# EAGLE board uhf.real.control.olimex (EAGLE 6.5.0)
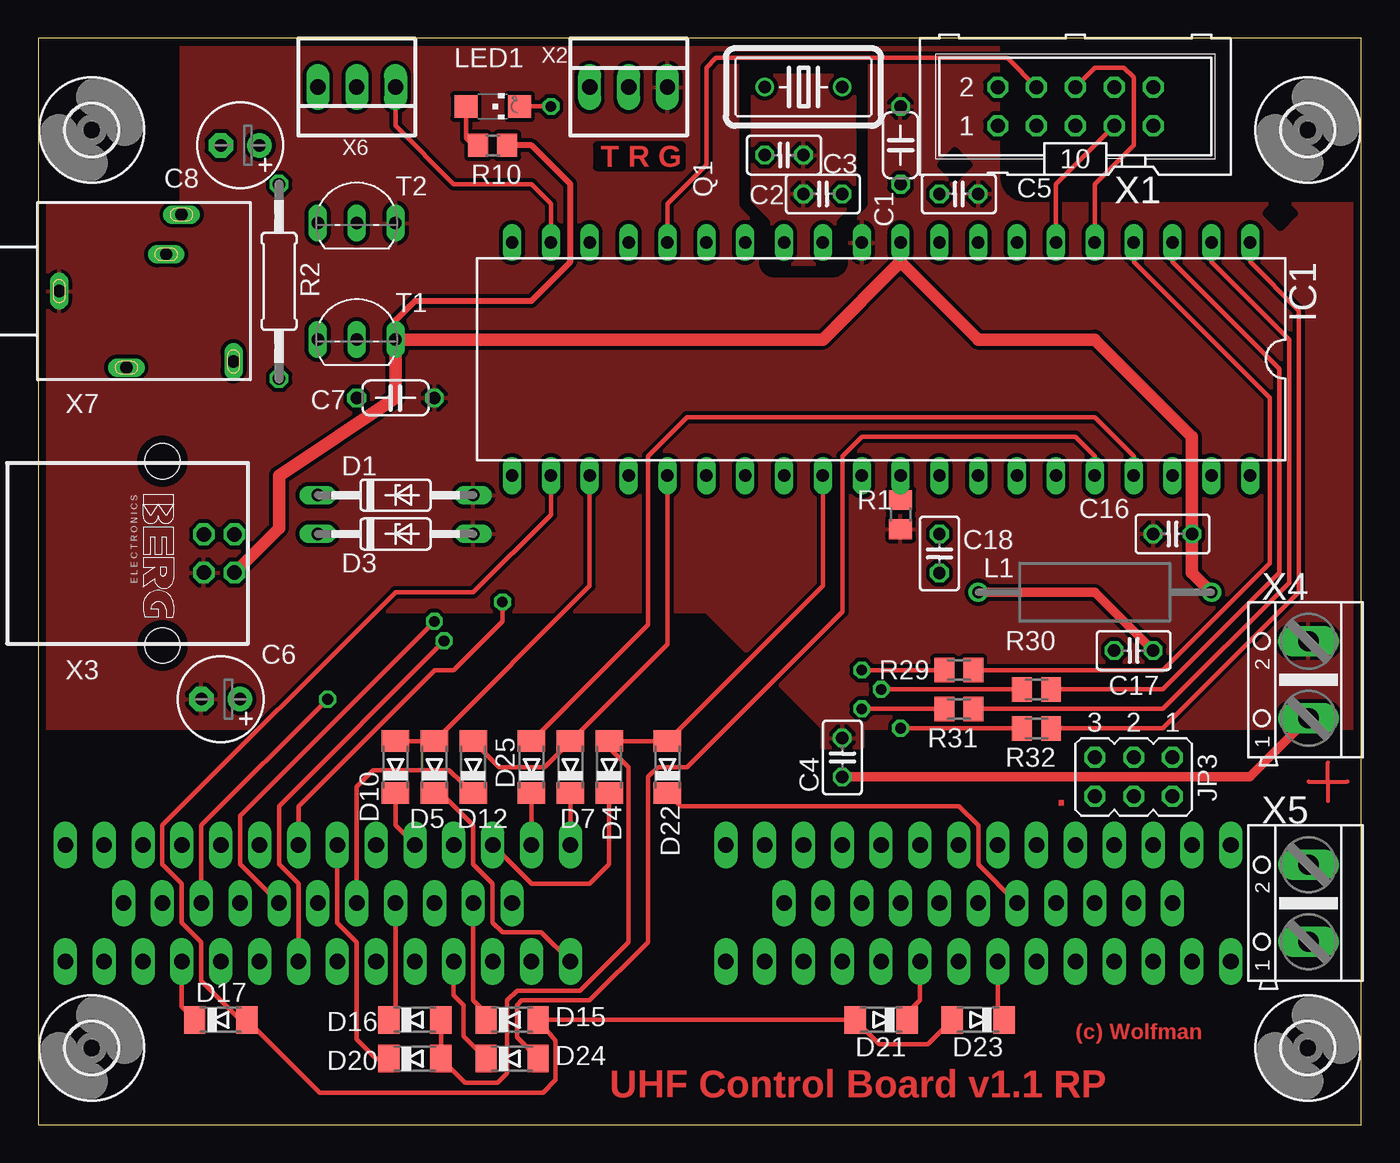
[diagram p0: board, top side]
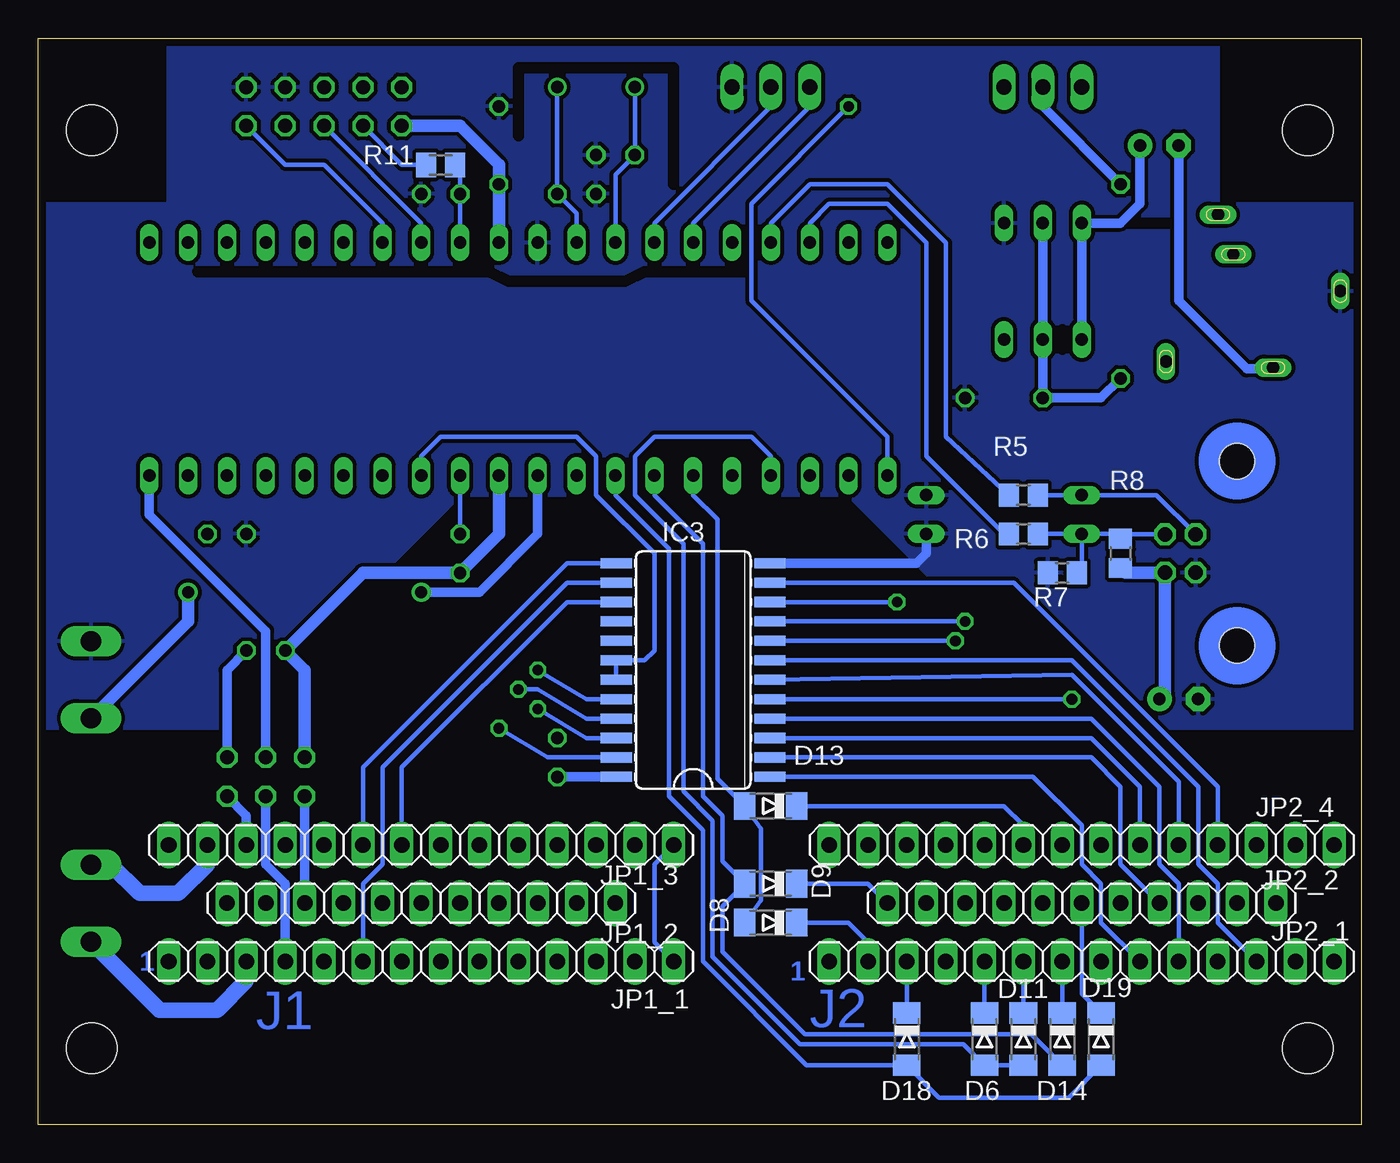
[diagram p1: board, bottom side, seen from below]

Size 86.5 x 71 mm. Coordinates in mm from the lower left corner, seen from the top.
Outline: 0,0 86.5,0 86.5,71 0,71 0,0
Copper layers (1*16): Top 0.035mm / dielectric 1.5mm / Bottom 0.035mm
Design rules "8mils *": minimum track width 8mil, minimum drill 0.7mm, track to track 8mil, track to pad 8mil, pad to pad 8mil, via to via 8mil, smd to smd 0mil, copper to edge 20mil, drill to drill 10mil, minimum pad ring 8mil, minimum via ring 8mil, stop-mask expansion 0mil, vias tented up to drill 0mil, thermal gap 10mil
tRestrict: area 59,61.8 to 60.8,63.6; area 80.3,58.7 to 82.1,60.5; 10 lines
bRestrict: 10 lines

## Footprints (pad centres in the part's own frame; a part is rotated, then mirrored left to right if it is on the bottom)
C050-024X044 = drill 0.813 octagon: 1 -2.54,0; 2 2.54,0
C025-025X050 = drill 0.813 octagon: 1 -1.27,0; 2 1.27,0
E2,5-6 = drill 0.813 pad 1.6: + -1.27,0 | drill 0.813 pad 1.6 octagon: - 1.27,0
DO35Z10 = drill 0.813 long: A 5.08,0; C -5.08,0
MINIMELF = smd 1.4 x 1.8: A 1.7,0; C -1.7,0
3,3 = hole 3.3: 0,0
DIL40 = drill 0.813 long: 1 -24.13,-7.62; 2 -21.59,-7.62; 3 -19.05,-7.62; 4 -16.51,-7.62; 5 -13.97,-7.62; 6 -11.43,-7.62; 7 -8.89,-7.62; 8 -6.35,-7.62; 9 -3.81,-7.62; 10 -1.27,-7.62; 11 1.27,-7.62; 12 3.81,-7.62; 13 6.35,-7.62; 14 8.89,-7.62; 15 11.43,-7.62; 16 13.97,-7.62; 17 16.51,-7.62; 18 19.05,-7.62; 19 21.59,-7.62; 20 24.13,-7.62; 21 24.13,7.62; 22 21.59,7.62; 23 19.05,7.62; 24 16.51,7.62; 25 13.97,7.62; 26 11.43,7.62; 27 8.89,7.62; 28 6.35,7.62; 29 3.81,7.62; 30 1.27,7.62; 31 -1.27,7.62; 32 -3.81,7.62; 33 -6.35,7.62; 34 -8.89,7.62; 35 -11.43,7.62; 36 -13.97,7.62; 37 -16.51,7.62; 38 -19.05,7.62; 39 -21.59,7.62; 40 -24.13,7.62
SO24W = smd 0.66 x 2.032: 1 -6.985,-5.029; 2 -5.715,-5.029; 3 -4.445,-5.029; 4 -3.175,-5.029; 5 -1.905,-5.029; 6 -0.635,-5.029; 7 0.635,-5.029; 8 1.905,-5.029; 9 3.175,-5.029; 10 4.445,-5.029; 11 5.715,-5.029; 12 6.985,-5.029; 13 6.985,5.029; 14 5.715,5.029; 15 4.445,5.029; 16 3.175,5.029; 17 1.905,5.029; 18 0.635,5.029; 19 -0.635,5.029; 20 -1.905,5.029; 21 -3.175,5.029; 22 -4.445,5.029; 23 -5.715,5.029; 24 -6.985,5.029
1X14 = drill 1.016 long: 1 -16.51,0; 2 -13.97,0; 3 -11.43,0; 4 -8.89,0; 5 -6.35,0; 6 -3.81,0; 7 -1.27,0; 8 1.27,0; 9 3.81,0; 10 6.35,0; 11 8.89,0; 12 11.43,0; 13 13.97,0; 14 16.51,0
1X11 = drill 1.016 long: 1 -12.7,0; 2 -10.16,0; 3 -7.62,0; 4 -5.08,0; 5 -2.54,0; 6 0,0; 7 2.54,0; 8 5.08,0; 9 7.62,0; 10 10.16,0; 11 12.7,0
JP3Q = drill 0.914 octagon: 1 -2.54,-1.27; 2 -2.54,1.27; 3 0,-1.27; 4 0,1.27; 5 2.54,-1.27; 6 2.54,1.27
2200-15.24 = drill 0.8 pad 1.27: 1 -7.62,0; 2 7.62,0
CHIPLED_1206 = smd 1.5 x 1.5: A 0,-1.75; C 0,1.75
HC18U-V = drill 0.813: 1 -2.54,0; 2 2.54,0
R0805 = smd 1.3 x 1.5: 1 -0.95,0; 2 0.95,0
0207/12 = drill 0.813 octagon: 1 -6.35,0; 2 6.35,0
M0805 = smd 1.3 x 1.6: 1 -0.95,0; 2 0.95,0
TO92-EBC = drill 0.813 long: B 0,-1.27; C 2.54,-1.27; E -2.54,-1.27
ML10 = drill 0.914 octagon: 1 -5.08,-1.27; 2 -5.08,1.27; 3 -2.54,-1.27; 4 -2.54,1.27; 5 0,-1.27; 6 0,1.27; 7 2.54,-1.27; 8 2.54,1.27; 9 5.08,-1.27; 10 5.08,1.27
22-23-2031 = drill 1 long: 1 -2.54,0; 2 0,0; 3 2.54,0
PN61729 = drill 0.95 octagon: 1 1.25,4.71; 2 -1.25,4.71; 3 -1.25,2.71; 4 1.25,2.71 | hole 2.3: -6.02,0; 6.02,0
AK500/2 = drill 1.321 long: 1 -2.515,0; 2 2.515,0
1503_09 = drill 0.8 pad 1.2 long: 1 0,-1.5; 2 -5,-5.9; 3 5,-9.5; 4 -4.6,-12.9; 5 2.4,-8.5

## Placement (x,y rotation side)
C1  100nF  [C050-024X044]  56.38,64 90 top
C2  22pF  [C025-025X050]  51.3,60.83 0 top
C3  22pF  [C025-025X050]  48.76,63.37 180 top
C4  10nF  [C025-025X050]  52.57,24 90 top
C5  10nF  [C025-025X050]  60.19,60.83 180 top
C6  10uF  [E2,5-6]  11.93,27.8 180 top
C7  100nF  [C050-024X044]  23.36,47.49 180 top
C8  100uF  [E2,5-6]  13.2,64 180 top
C16  100pF  [C025-025X050]  74.16,38.6 180 top
C17  100pF  [C025-025X050]  71.62,30.98 180 top
C18  10nF  [C025-025X050]  58.92,37.33 270 top
D1  3.3V  [DO35Z10]  23.36,41.14 0 top
D3  3.3V  [DO35Z10]  23.36,38.6 0 top
D4  1N4148  [MINIMELF]  37.33,23.36 90 top
D5  1N4148  [MINIMELF]  25.9,23.36 90 top
D6  1N4148  [MINIMELF]  24.63,5.58 270 bottom
D7  1N4148  [MINIMELF]  34.79,23.36 90 top
D8  1N4148  [MINIMELF]  38.6,13.2 180 bottom
D9  1N4148  [MINIMELF]  38.6,15.74 180 bottom
D10  1N4148  [MINIMELF]  23.36,23.36 90 top
D11  1N4148  [MINIMELF]  22.09,5.58 270 bottom
D12  1N4148  [MINIMELF]  28.44,23.36 90 top
D13  1N4148  [MINIMELF]  38.6,20.82 180 bottom
D14  1N4148  [MINIMELF]  19.55,5.58 270 bottom
D15  1N4148  [MINIMELF]  30.98,6.85 0 top
D16  1N4148  [MINIMELF]  24.63,6.85 0 top
D17  1N4148  [MINIMELF]  11.93,6.85 0 top
D18  1N4148  [MINIMELF]  29.71,5.58 270 bottom
D19  1N4148  [MINIMELF]  17.01,5.58 270 bottom
D20  1N4148  [MINIMELF]  24.63,4.31 0 top
D21  1N4148  [MINIMELF]  55.11,6.85 180 top
D22  1N4148  [MINIMELF]  41.14,23.36 90 top
D23  1N4148  [MINIMELF]  61.46,6.85 180 top
D24  1N4148  [MINIMELF]  30.98,4.31 0 top
D25  1N4148  [MINIMELF]  32.25,23.36 90 top
H1  MOUNT-HOLE3.3  [3,3]  83,5 0 top
H2  MOUNT-HOLE3.3  [3,3]  3.5,65 0 top
H3  MOUNT-HOLE3.3  [3,3]  83,65 0 top
H4  MOUNT-HOLE3.3  [3,3]  3.5,5 0 top
IC1  MEGA16-P  [DIL40]  55.11,50.03 180 top
IC3  74HC154DW  [SO24W]  43.68,29.71 90 bottom
JP1_1  [1X14]  61.46,10.66 180 bottom
JP1_2  [1X11]  61.46,14.47 180 bottom
JP1_3  [1X14]  61.46,18.28 0 bottom
JP2_1  [1X14]  18.28,10.66 180 bottom
JP2_2  [1X11]  18.28,14.47 0 bottom
JP2_4  [1X14]  18.28,18.28 0 bottom
JP3  [JP3Q]  71.62,22.73 180 top
L1  10uH  [2200-15.24]  69.08,34.79 180 top
LED1  yellow  [CHIPLED_1206]  29.71,66.54 270 top
Q1  16 MHz  [HC18U-V]  50.03,67.81 180 top
R1  0 Ohm  [R0805]  56.38,39.87 90 top
R2  820R  [0207/12]  15.74,55.11 270 top
R5  82R  [R0805]  22.09,41.14 180 bottom
R6  82R  [R0805]  22.09,38.6 180 bottom
R7  4.7k  [R0805]  19.55,36.06 0 bottom
R8  2.2k  [R0805]  15.74,37.33 270 bottom
R10  220R  [R0805]  29.71,64 180 top
R11  8k2  [M0805]  60.19,62.73 0 bottom
R29  150R  [M0805]  60.19,29.71 180 top
R30  150R  [M0805]  65.27,28.44 180 top
R31  150R  [M0805]  60.19,27.17 180 top
R32  150R  [M0805]  65.27,25.9 180 top
T1  BC337  [TO92-EBC]  20.82,52.57 0 top
T2  BC327  [TO92-EBC]  20.82,60.19 0 top
X1  SPI  [ML10]  67.81,66.54 0 top
X2  Serial  [22-23-2031]  38.6,67.81 0 top
X3  USB-B  [PN61729]  8.12,37.33 270 top
X4  Power  [AK500/2]  83.05,29.07 90 top
X5  LED  [AK500/2]  83.05,14.47 90 top
X6  Volume poti 10k  [22-23-2031]  20.82,67.81 180 top
X7  EBS 35  [1503_09]  -0.14,54.48 90 top

## Library data of the parts
C1-C8 C16-C18 L1 R1 R2 R5-R8 R10 R11 R29-R32 = rcl
D1 D3-D25 = diode
H1-H4 = holes
IC1 = atmel
IC3 = 74xx-eu
JP1_1-JP1_3 JP2_1 JP2_2 JP2_4 = pinhead
JP3 = jumper
LED1 = led
Q1 = crystal
T1 T2 = transistor
X1 = con-harting-ml
X2 X6 = con-molex; MF: MOLEX; MPN: 22-23-2031; OC_FARNELL: 1462950; OC_NEWARK: 30C0862
X3 = con-berg
X4 X5 = con-ptr500
X7 = con-lumberg

## Nets
1_DIGIT: D5.C JP2_1.14
2_DIGIT: D6.C JP2_1.10
3_DIGIT: D7.C JP2_4.1
4_DIGIT: D8.C JP2_1.13
56_DIGIT: D9.C JP2_2.1
/RESET: C5.2 IC1.9 R11.2
A-GND: JP1_1.1 JP1_3.14
AGND: C17.2 C18.2 IC1.31 JP3.5 R1.2
AREF: C18.1 IC1.32
AVCC: C17.1 IC1.30 JP3.1 L1.2
CH_KNOB[2]: D14.C JP2_1.8
CH_KNOB[3]: D11.C JP2_1.9
CH_KNOB[4]: D12.C JP2_2.5
CH_KNOB[5]: D13.C JP2_4.6
CH_KNOB[6]: D10.C JP2_4.5
COMMON-WIRE>MS[2],SQUELCH: IC3.14 JP1_1.9
COMMON-WIRE>ZEROIZE: JP1_1.4
COMMON_WIRE>LOAD,CH_KNOB[1]: IC3.11 JP2_4.11
COMMON_WIRE>SQUELCH: D16.C JP2_2.4
COMMON_WIRE>TONE: D15.C JP2_2.2
FILL_PORT[1]: JP2_2.3
FILL_PORT[2]: JP2_4.4
FILL_PORT[3]: JP1_1.5
FILL_PORT[5]: JP1_3.9
FILL_PORT[6]: JP1_2.4
FS(GUARD): D23.C JP1_1.8
FS(MNL),POS_4: IC3.4 JP2_1.5
FS(MNL,PRESET): JP1_1.7
FS[1],MS(BOTH): JP1_2.5
FS[2]: D18.C JP2_1.12
FS[3]: JP1_2.6
GND: C1.2 C2.1 C3.1 C4.2 C5.1 C6.- C7.1 C16.2 D1.A D3.A IC1.11 IC3.12 R1.1 R7.1 T2.C X1.8 X1.10 X2.3 X3.4 X4.2 X7.1
GUARD_SQUELCH(+): JP1_1.10
GUARD_SQUELCH(W): JP1_3.4
IN: D1.C R5.1 X3.3
INHIBIT: IC1.33 IC3.18 IC3.19
INPUT_0: D15.A D17.A D21.A D23.A IC1.22
INPUT_1: D5.A D10.A IC1.23
INPUT_2: D6.A D11.A IC1.24
INPUT_3: D7.A D12.A IC1.25
INPUT_4: D8.A D13.A IC1.26
INPUT_5: D9.A D14.A IC1.27
INPUT_6: D18.A D19.A IC1.28
INPUT_7: D4.A D16.A D20.A D22.A IC1.29
INPUT_8: D24.A IC1.36
INPUT_9: D25.A IC1.37
LED+: JP1_1.12 X5.1
LED-: JP1_3.2 X5.2
LOAD_BTN: D17.C JP2_1.4
MAN_SQUELCH(+): JP1_3.5
MAN_SQUELCH(W): JP1_2.8
MISO: IC1.7 X1.9
MOSI: IC1.6 X1.7
MS(ADF): D21.C JP1_1.6
MS(BOTH): D20.C JP2_4.7
MS(MAIN): JP1_3.8
MS(MAIN)1: D19.C JP2_2.6
MS(MAIN,BOTH): D22.C JP1_2.7
MS[1]: IC3.15 JP1_3.7
MS[3]: IC3.13 JP1_3.6
N$1: IC3.23 R32.2
N$2: C7.2 R2.2 T1.B T2.B
N$3: IC3.22 R31.2
N$4: IC3.21 R30.2
N$5: C8.+ T1.E T2.E
N$6: C8.- X7.2
N$7: IC3.20 R29.2
N$8: IC1.4 R29.1
N$9: IC1.3 R30.1
N$10: IC1.2 R31.1
N$11: IC1.1 R32.1
N$17: R2.1 X6.2
N$47: LED1.A R10.2
OUT: D3.C R6.1 R7.2 R8.1 X3.2
OUTPUT_0: IC3.16
POS_1: IC3.1 JP2_1.6
POS_2: IC3.2 JP2_2.8
POS_3: IC3.3 JP2_4.9
POS_5,FS(PRESET),TONE-T: IC3.5 JP2_2.9
POS_7: IC3.7 JP2_1.3
POS_8: IC3.8 JP2_1.7
POS_9: IC3.9 JP2_2.7
POS_10: IC3.10 JP2_4.8
RESET: R11.1 X1.3
RX: IC1.14 X2.2
SCK: IC1.8 X1.5
SS: IC1.5 X1.6
STATUS_BTN: D24.C JP2_1.11
STATUS_LED: IC1.21 LED1.C
TEST_BTN: D4.C JP2_4.3
TONE_SIGNAL: IC1.19 X6.1
TRIGGER: IC1.16 X1.4
TX: IC1.15 X2.1
USB_IN: IC1.17 R5.2
USB_OUT: IC1.18 R6.2
VCC: C1.1 C4.1 C6.+ C16.1 IC1.10 IC3.24 L1.1 R8.2 R10.1 T1.C X1.1 X3.1 X4.1
VOLUME(+): JP1_3.3 JP3.2
VOLUME(-): JP1_2.9 JP3.6
VOLUME(W): JP1_1.11 JP3.4
VOLUME_ADC: IC1.40 JP3.3
XTAL1: C3.2 IC1.13 Q1.2
XTAL2: C2.2 IC1.12 Q1.1
ZEROIZE[2],TONE-TONE,FS(GRD),TEST,STATUS,POS_6: IC3.6 JP2_4.10
ZEROIZE[5]: JP1_3.10
ZEROIZE[10]: D25.C JP2_4.2

## Tracks (layer width: path | path; a pad name or v marks a point on that pad's centre or on a via)
1_DIGIT
  Top 0.305: D5.C 26.33,21.66 28.44,19.55 28.44,17.01 29.71,15.74 29.71,13.2 30.34,12.56 32.88,12.56 JP2_1.14
2_DIGIT
  Bottom 0.305: D6.C JP2_1.10
3_DIGIT
  Top 0.305: JP2_4.1 D7.C
4_DIGIT
  Bottom 0.305: D8.C 33.52,13.2 32.25,11.93 JP2_1.13
56_DIGIT
  Bottom 0.305: D9.C 32.25,15.74 JP2_2.1
/RESET
  Bottom 0.305: IC1.9 C5.2 58.92,62.41 R11.2
A-GND
  Bottom 0.305: JP1_1.1 46.22,11.93 46.22,17.01 JP1_3.14
AGND
  Top 0.813: IC1.31 R1.2
  Bottom 0.813: JP3.5 69.08,29.71 C17.2 65.27,36.06 C18.2 56.38,38.6 IC1.31
AREF
  Bottom 0.305: C18.1 IC1.32
AVCC
  Top 0.61: L1.2 69.08,34.79 C17.1
  Bottom 0.61: L1.2 57.65,34.79 53.84,38.6 IC1.30 | C17.1 74.16,29.71 JP3.1
CH_KNOB[2]
  Bottom 0.305: D14.C JP2_1.8
CH_KNOB[3]
  Bottom 0.305: D11.C JP2_1.9
CH_KNOB[4]
  Top 0.305: JP2_2.5 20.82,22.09 21.89,23.16 26.85,23.16 D12.C
CH_KNOB[5]
  Bottom 0.305: D13.C 23.36,20.82 22.09,19.55 JP2_4.6
CH_KNOB[6]
  Top 0.305: D10.C 23.36,19.55 JP2_4.5
COMMON-WIRE>MS[2],SQUELCH
  Bottom 0.305: IC3.14 51.94,35.42 64,23.36 64,17.01 65.27,15.74 JP1_1.9
COMMON_WIRE>LOAD,CH_KNOB[1]
  Bottom 0.305: IC3.11 22.73,35.42 9.39,22.09 JP2_4.11
COMMON_WIRE>SQUELCH
  Top 0.305: D16.C 23.36,6.85 JP2_2.4
COMMON_WIRE>TONE
  Top 0.305: D15.C 29.28,7.28 28.44,8.12 JP2_2.2
FS(GUARD)
  Top 0.305: D23.C arc-90 62.73,7.28 JP1_1.8
FS(MNL),POS_4
  Bottom 0.305: IC3.4 17.64,26.54 13.2,22.09 13.2,17.01 11.93,15.74 JP2_1.5
FS[2]
  Bottom 0.305: D18.C JP2_1.12
GND
  Bottom 0.61: IC3.12 29.07,36.7 28.44,37.33 D3.A
  pour Top (isolate 0.254): 9.39,71.62 62.73,71.62 62.73,61.99 arc90 64.53,60.19 86.86,60.19 86.86,25.9 53.84,25.9 53.84,24.63 51.3,24.63 51.3,25.9 43.68,33.52 22.09,33.52 14.47,25.9 0.5,25.9 0.5,60.19 9.39,60.19
  pour Bottom (isolate 0.254): 9.39,71.62 9.39,60.19 0.5,60.19 0.5,25.9 18.28,25.9 33.52,41.14 58.92,41.14 74.16,25.9 86.86,25.9 86.86,60.19 77.97,60.19 77.97,71.62
IN
  Bottom 0.305: X3.3 13.39,41.14 D1.C R5.1
INHIBIT
  Bottom 0.305: IC3.19 IC3.18 46.85,30.34 46.22,30.98 46.22,37.33 50.03,41.14 50.03,43.68 51.3,44.95 60.19,44.95 61.46,43.68 IC1.33
INPUT_0
  Top 0.305: IC1.22 33.52,39.87 28.44,34.79 23.36,34.79 8.12,19.55 8.12,17.01 9.39,15.74 9.39,13.2 10.66,11.93 10.66,9.39 13.2,6.85 D17.A 18.39,2.09 33,2.09 33.84,2.93 33.84,5.47 D15.A D21.A 55,5.26 58.17,5.26 D23.A
INPUT_1
  Top 0.305: D10.A D5.A 36.06,35.22 IC1.23
INPUT_2
  Bottom 0.305: D11.A D6.A 26.01,5.26 36.7,5.26 42.41,10.98 42.41,19.87 44.31,21.77 44.31,37.97 47.49,41.14 47.49,43.68 46.22,44.95 39.87,44.95 38.6,43.68 IC1.24
INPUT_3
  Top 0.305: IC1.25 41.14,31.41 D7.A 33.09,23.36 30.14,23.36 D12.A
INPUT_4
  Bottom 0.305: D8.A 39.23,14.68 39.23,19.34 D13.A 42.09,22.61 42.09,39.55 43.68,41.14 IC1.26
INPUT_5
  Bottom 0.305: IC1.27 46.22,41.14 43.05,37.97 43.05,21.45 41.77,20.18 41.77,17.21 D9.A 41.77,14.27 41.77,11.29 36.38,5.9 21.57,5.9 D14.A
INPUT_6
  Bottom 0.305: IC1.28 48.76,41.14 45.27,37.65 45.27,21.45 43.05,19.23 43.05,10.66 36.27,3.88 D18.A 27.6,1.77 25.06,1.77 19.12,1.77 D19.A
INPUT_7
  Top 0.305: D16.A D20.A 27.92,2.72 30.03,2.72 30.66,3.36 30.66,8.12 31.3,8.76 35.42,8.76 38.6,11.93 38.6,23.36 37.33,24.63 D4.A D22.A 51.3,35.22 IC1.29
INPUT_8
  Top 0.305: IC1.36 69.08,43.68 67.81,44.95 53.84,44.95 52.57,43.68 52.57,33.52 42.41,23.36 40.51,23.36 39.87,22.73 39.87,11.93 36.06,8.12 31.61,8.12 31.3,7.8 31.3,5.69 D24.A
INPUT_9
  Top 0.305: IC1.37 71.62,43.68 69.08,46.22 42.41,46.22 39.87,43.68 39.87,32.68 D25.A
LED+
  Bottom 1.016: JP1_1.12 72.89,9.39 74.8,7.49 78.61,7.49 78.61,7.51 X5.1
LED-
  Bottom 1.016: X5.2 81.75,16.98 79.88,15.11 77.33,15.11 75.43,17.01 JP1_3.2
LOAD_BTN
  Top 0.305: D17.C 9.39,7.69 JP2_1.4
MISO
  Bottom 0.305: IC1.7 64,58.92 67.81,62.73 70.35,62.73 X1.9
MOSI
  Top 0.305: IC1.6 66.54,61.46 X1.7
MS(ADF)
  Top 0.305: D21.C 56.81,7.28 57.65,8.12 JP1_1.6
MS(BOTH)
  Top 0.305: D20.C 22.09,4.31 20.82,5.58 20.82,11.93 19.55,13.2 JP2_4.7
MS(MAIN)1
  Bottom 0.305: JP2_2.6 18.28,8.55 D19.C
MS(MAIN,BOTH)
  Top 0.305: JP1_2.7 61.46,17.01 61.46,19.55 60.19,20.82 41.98,20.82 D22.C
MS[1]
  Bottom 0.305: IC3.15 51.94,34.16 62.73,23.36 JP1_3.7
MS[3]
  Bottom 0.305: IC3.13 51.94,36.7 65.27,23.36 JP1_3.6
N$1  (via drill 0.7)
  Top 0.305: v56.38,25.9 R32.2
  Bottom 0.305: IC3.23 53.2,24 v56.38,25.9
N$2
  Bottom 0.61: R2.2 17.01,47.49 C7.2 T1.B T2.B
N$3  (via drill 0.7)
  Top 0.305: v53.84,27.17 R31.2
  Bottom 0.305: IC3.22 50.66,25.27 v53.84,27.17
N$4  (via drill 0.7)
  Top 0.305: v55.11,28.44 R30.2
  Bottom 0.305: IC3.21 50.66,26.54 53.84,28.44 v55.11,28.44
N$5
  Bottom 0.61: T1.E T2.E 15.74,58.92 14.47,60.19 C8.+
N$6
  Bottom 0.61: X7.2 5.84,49.4 7.49,49.4 11.93,53.84 C8.-
N$7  (via drill 0.7)
  Top 0.305: v53.84,29.71 R29.2
  Bottom 0.305: IC3.20 50.66,27.8 v53.84,29.71
N$8
  Top 0.305: IC1.4 71.62,56.38 80.51,47.49 80.51,36.7 73.53,29.71 R29.1
N$9
  Top 0.305: IC1.3 74.16,56.38 81.14,49.4 81.14,36.06 73.53,28.44 R30.1
N$10
  Top 0.305: IC1.2 76.7,56.38 81.78,51.3 81.78,35.42 73.53,27.17 R31.1
N$11
  Top 0.305: IC1.1 79.24,56.38 82.42,53.2 82.42,34.79 73.53,25.9 R32.1
N$17
  Bottom 0.61: X6.2 20.82,66.54 R2.1
N$47
  Top 0.305: LED1.A 27.96,64.48 28.44,64 R10.2
OUT
  Bottom 0.305: X3.2 15.44,38.58 R8.1 16.06,38.6 D3.C | D3.C 18.28,36.06 R7.2 | D3.C R6.1
POS_1
  Bottom 0.305: IC3.1 21.45,22.73 18.28,19.55 18.28,17.01 17.01,15.74 17.01,13.2 JP2_1.6
POS_2
  Bottom 0.305: IC3.2 17.64,24 15.74,22.09 15.74,17.01 JP2_2.8
POS_3
  Bottom 0.305: IC3.3 17.64,25.27 14.47,22.09 JP2_4.9
POS_5,FS(PRESET),TONE-T  (via drill 0.7)
  Top 0.305: v18.91,27.8 10.66,19.55 JP2_2.9
  Bottom 0.305: v18.91,27.8 IC3.5
POS_7
  Bottom 0.305: IC3.7 18.91,30.34 10.66,22.09 10.66,17.01 9.39,15.74 9.39,13.2 JP2_1.3
POS_8  (via drill 0.7)
  Top 0.305: v26.54,31.61 15.74,20.82 15.74,17.01 17.01,15.74 JP2_1.7
  Bottom 0.305: v26.54,31.61 IC3.8
POS_9  (via drill 0.7)
  Top 0.305: v25.9,32.88 13.2,20.18 13.2,17.01 JP2_2.7
  Bottom 0.305: v25.9,32.88 IC3.9
POS_10  (via drill 0.7)
  Top 0.305: v30.34,34.16 30.34,32.88 27.17,29.71 25.9,29.71 17.01,20.82 JP2_4.8
  Bottom 0.305: v30.34,34.16 IC3.10
RESET
  Bottom 0.305: R11.1 62.73,62.73 X1.3
RX
  Bottom 0.305: IC1.14 46.22,58.92 38.6,66.54 X2.2
SCK
  Bottom 0.305: IC1.8 61.46,58.92 X1.5
SS
  Top 0.305: IC1.5 69.08,61.46 71.62,64 71.62,68.44 70.98,69.08 69.08,69.08 X1.6
STATUS_BTN
  Top 0.305: JP2_1.11 27.17,8.44 27.8,7.8 27.8,5.79 D24.C
STATUS_LED  (via drill 0.7)
  Top 0.305: v33.52,66.54 LED1.C
  Bottom 0.305: v33.52,66.54 39.87,60.19 39.87,53.84 30.98,44.95 IC1.21
TEST_BTN
  Top 0.305: D4.C 37.33,17.01 36.06,15.74 32.25,15.74 JP2_4.3
TONE_SIGNAL
  Top 0.305: IC1.19 33.52,60.19 32.25,61.46 27.17,61.46 23.36,65.27 X6.1
TRIGGER
  Top 0.305: X1.4 63.37,69.72 44.31,69.72 43.68,69.08 43.68,62.73 41.14,60.19 IC1.16
TX
  Bottom 0.305: IC1.15 43.68,58.92 36.06,66.54 X2.1
USB_IN
  Bottom 0.305: IC1.17 38.6,58.92 36.06,61.46 30.98,61.46 27.17,57.65 27.17,44.95 R5.2
USB_OUT
  Bottom 0.305: IC1.18 36.06,58.92 34.79,60.19 30.98,60.19 28.44,57.65 28.44,43.68 23.36,38.6 R6.2
VCC
  Top 0.406: T1.C 23.36,52.57 24.63,53.84 32.25,53.84 34.79,56.38 34.79,61.46 32.25,64 R10.1
  Top 0.61: C4.1 79.22,22.73 X4.1
  Top 0.813: X3.1 15.74,38.99 15.74,42.41 23.36,47.49 T1.C 51.3,51.3 56.38,56.38 | 56.38,56.38 61.46,51.3 69.08,51.3 75.43,44.95 C16.1 75.43,36.06 L1.1 | 56.38,56.38 IC1.10
  Bottom 0.61: C4.1 IC3.24
  Bottom 0.813: IC1.10 C1.1 56.38,62.73 58.92,65.27 X1.1 | R8.2 15.44,36.08 X3.1 12.83,28.18 C6.+ | L1.1 76.7,32.91 X4.1
VOLUME(+)
  Bottom 0.61: JP3.2 72.89,20.18 JP1_3.3
VOLUME(-)
  Bottom 0.61: JP1_2.9 JP3.6
VOLUME(W)
  Bottom 0.61: JP3.4 71.62,17.01 70.35,15.74 JP1_1.11
VOLUME_ADC
  Bottom 0.61: IC1.40 79.24,39.87 71.62,32.25 JP3.3
X
  Top 0.254: 84.32,22.41 85.59,22.41 | 83.05,22.41 84.32,22.41 | 84.32,22.41 84.32,21.14 | 84.32,22.41 84.32,23.68
XTAL1
  Bottom 0.305: IC1.13 48.76,62.09 C3.2 Q1.2
XTAL2
  Bottom 0.305: IC1.12 51.3,59.55 C2.2 Q1.1
ZEROIZE[2],TONE-TONE,FS(GRD),TEST,STATUS,POS_6
  Bottom 0.305: IC3.6 18.91,29.39 11.93,22.41 JP2_4.10
ZEROIZE[10]
  Top 0.305: JP2_4.2 D25.C
(copper drawn outside any net)
  shapes: Bottom circle x2

## Text on the board
Top: T R G | . | (c) Wolfman | UHF Control Board v1.1 RP
Bottom: 1 | 1 | J2 | J1
tRestrict: .
Document: Discrete diodes can be soldered to pads | when SMD diodes are bridged